# Altium PCB PC110-itx.PcbDoc (part 11 of 16)
Units mm, origin at the board's own origin, x right, y up, seen from the top; angles counter-clockwise.
Board outline 170 x 170 mm, 16 copper layers (FC1, FC2, FC3, FC4, IP1, IC1, IC2, IP2, IP3, IC3, IC4, IP4, BC4, BC3, BC2, BC1), stack 3.903 mm thick; 935 components, 1357 nets, 4698 pads, 3240 vias.
Unrouted connection lines stored in the file: 552.
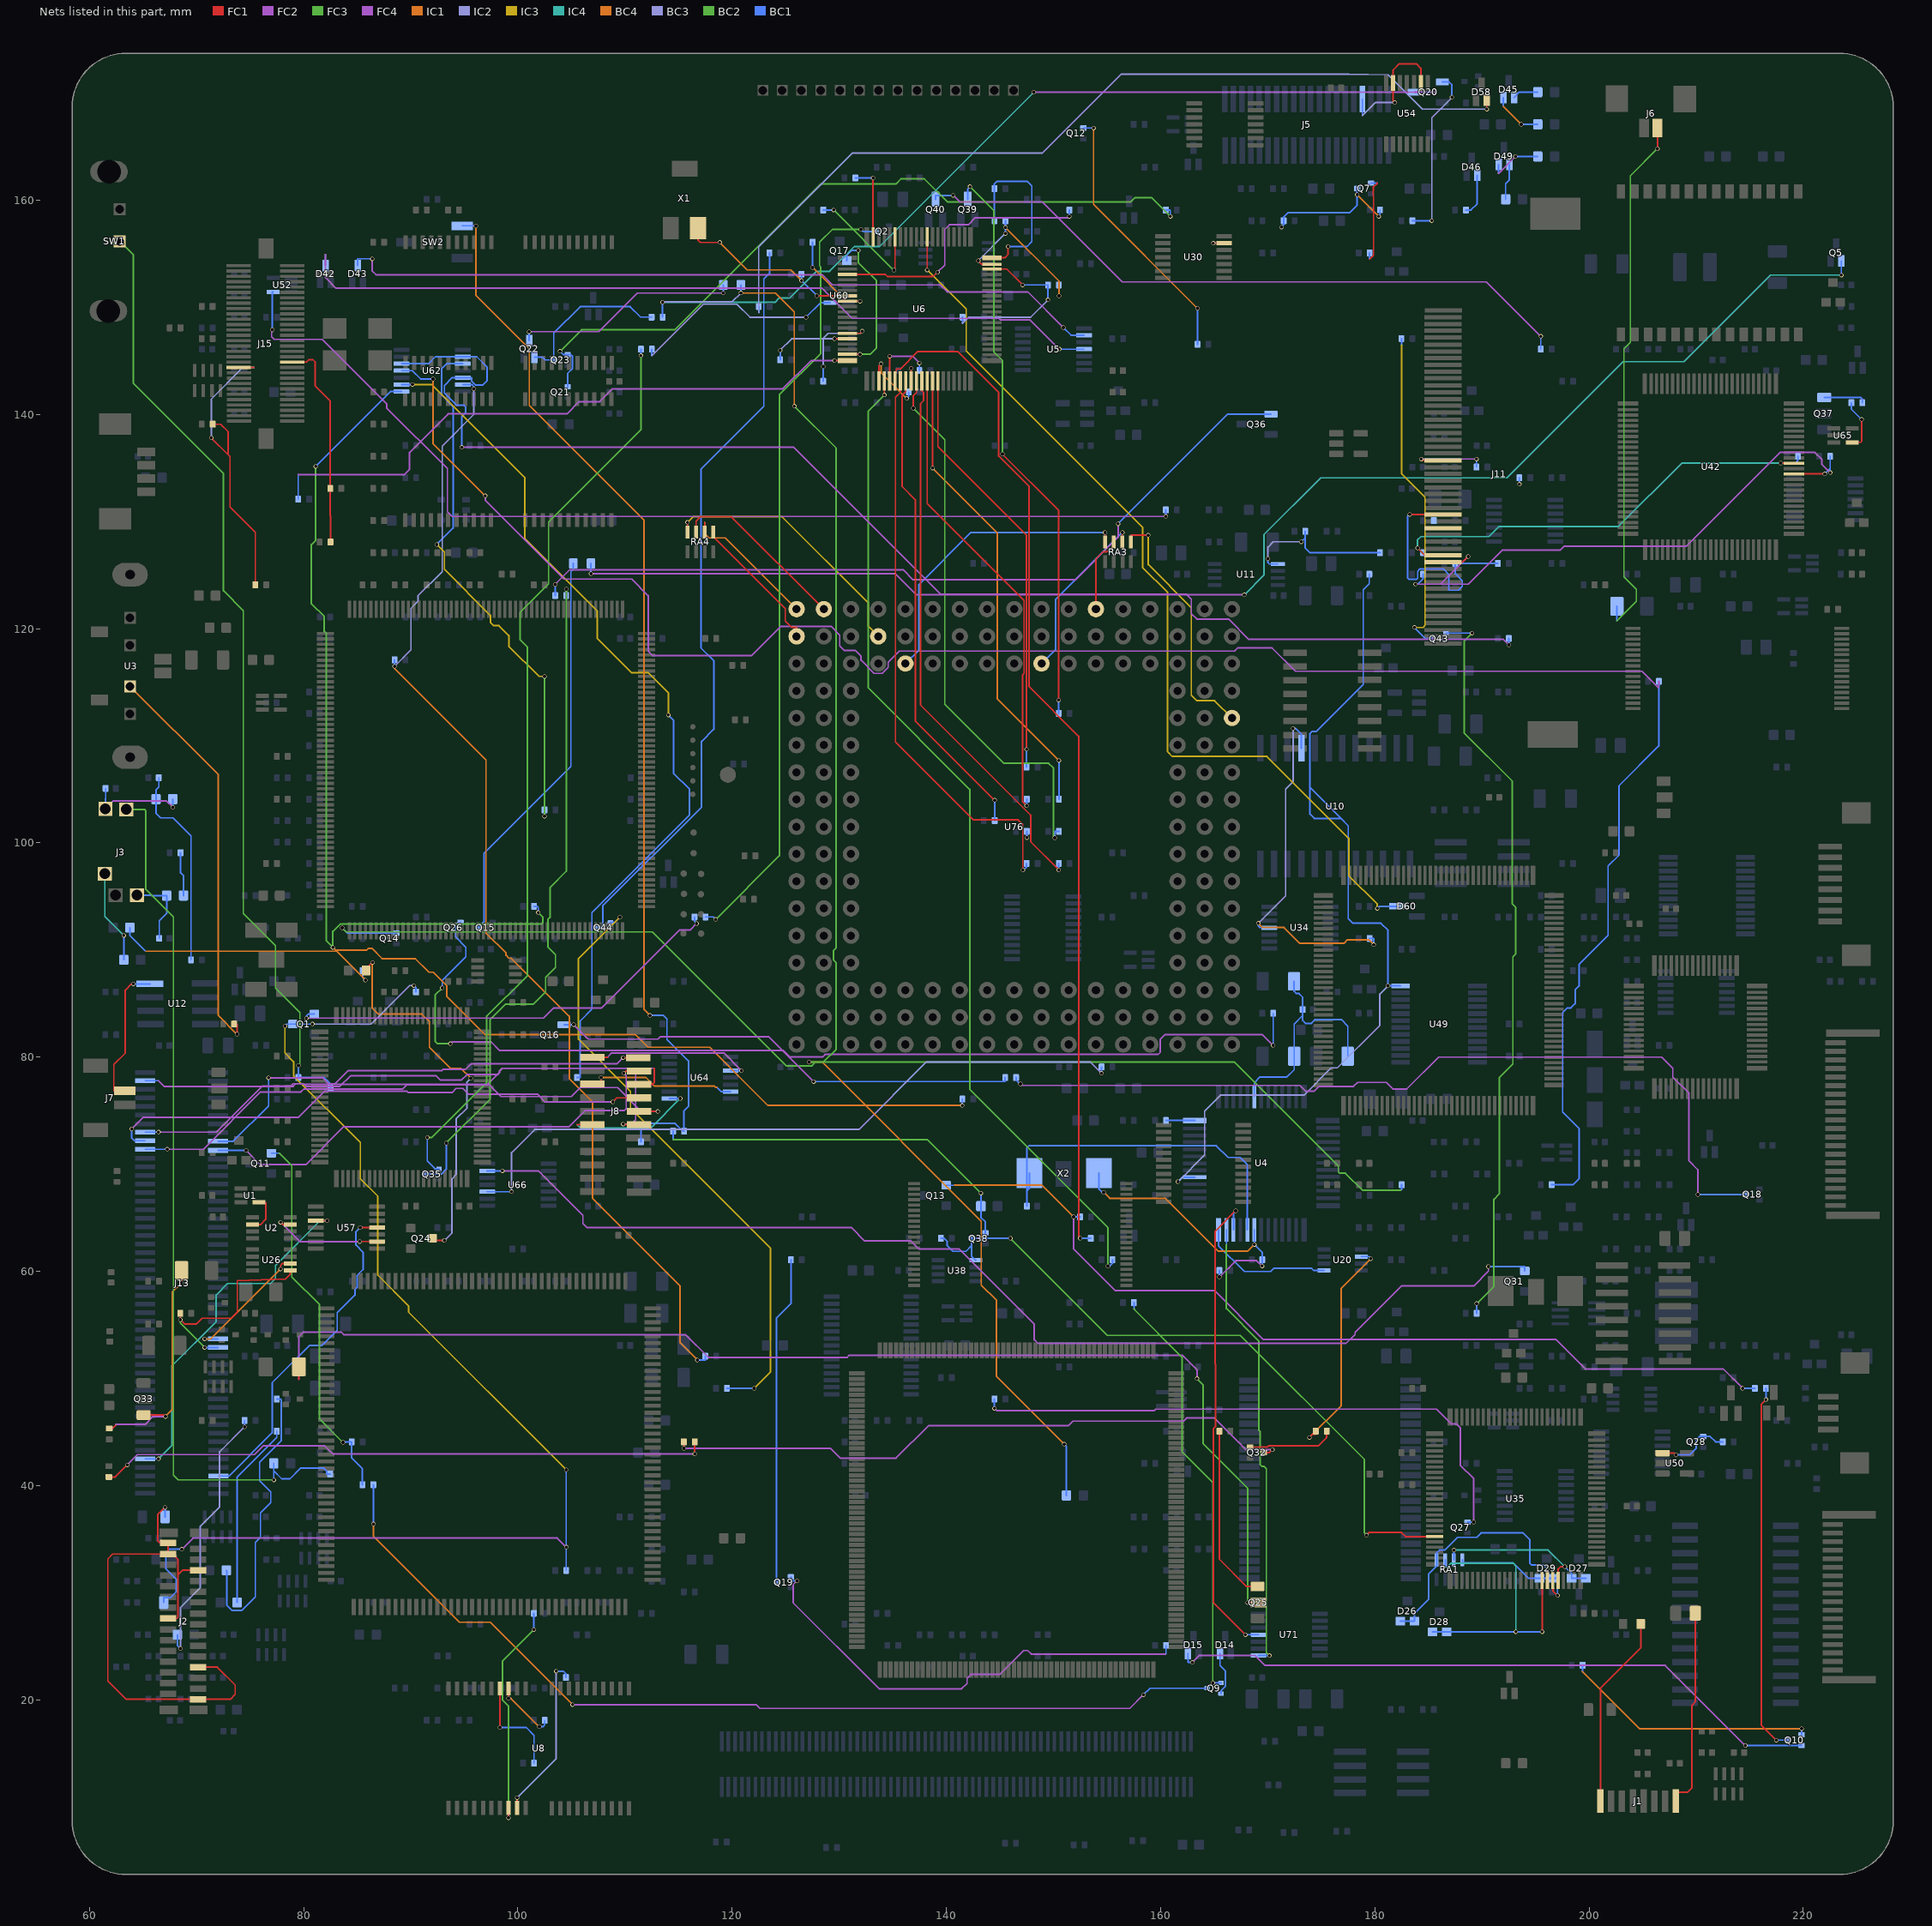
[diagram p24: the nets of this part, all layers, seen from the top]

## Via types
v1: diameter 0.4, hole 0.3, FC1 to BC1, 3240 vias

## Nets (pads, with @x,y where several pads share a name; then routed paths per layer and width w, separated by ;. In a path a pad name is that pad's centre, name@x,y a point inside that pad or via, vN(x,y) a via of type N, cw(c..) or ccw(c..) an arc to the next point about the centre after c; other vN are vias at no path point) (continued)
Net-(D42-Pad3): D42.3 U5.4 | length 76.8
  FC2 w0.15: 82.05,154.932 82.042,154.94 82.042,152.756 83.007,151.79 128.388,151.79 131.207,148.971 144.905,148.971 145.059,148.818 147.818,148.818 v1(150.546,146.09)
  BC1 w0.15: D42.3@82.05,153.89 82.05,154.932 ; v1(150.546,146.09) U5.4@152.862,146.09
Net-(D43-Pad3): D43.3 U5.2 | length 72.1
  FC2 w0.15: v1(86.411,154.534) 86.411,153.391 86.766,153.035 128.443,153.035 129.383,152.095 139.421,152.095 140.081,151.435 147.599,151.435 v1(150.927,148.107)
  BC1 w0.15: D43.3@85.05,153.89 85.05,154.534 v1(86.411,154.534) ; v1(150.927,148.107) 151.644,147.39 U5.2@152.862,147.39
Net-(D44-A): D44.2 D45.1 | length 4.7
  BC4 w0.15: 192,168.759 191.999,168.758 v1(193.666,167.09)
  BC1 w0.15: 192,168.759 D45.1@192,169.585 ; v1(193.666,167.09) D44.2@195.213,167.09
Net-(D46-Pad2): D46.2 R286.1 | length 4
  BC1 w0.15: R286.1@188.51,159.09 188.976,159.09 189.55,159.664 D46.2@189.55,162.34
Net-(D48-A): D45.2 D48.2 | length 2.4
  BC1 w0.15: D45.2@193,169.585 193.505,170.09 D48.2@195.213,170.09
Net-(D50-A): D49.1 D50.2 | length 5.1
  FC4 w0.15: 191.55,162.518 v1(193.122,164.09)
  BC1 w0.15: 191.55,162.518 D49.1@191.55,163.34 ; v1(193.122,164.09) D50.2@195.213,164.09
Net-(D51-A): D49.2 D51.2 | length 3.4
  BC1 w0.15: D51.2@192.213,160.09 192.213,161.544 192.55,161.881 D49.2@192.55,163.34
Net-(D58-K): D58.1 R308.2 | length 83.6
  FC1 w0.15: v1(190.449,168.504) D58.1@190.45,169.34
  IC2 w0.15: 122.49,149.501 122.479,149.49 122.479,155.651 131.216,164.389 148.946,164.389 156.336,171.78 177.571,171.78 181.229,171.704 184.429,168.504 v1(190.449,168.504)
  BC1 w0.15: 122.49,149.501 R308.2@122.49,150.09
Net-(J1-GND-Pad1): J1.1 R231.2 | length 18.1
  FC1 w0.15: J1.1@201.06,10.55 201.06,21.101 204.825,24.866 R231.2@204.825,27.09
Net-(J1-GND-Pad8): J1.8 R230.2 | length 18.9
  FC1 w0.15: J1.8@208.11,10.55 208.11,11.379 209.194,11.379 209.601,11.786 209.601,19.5 209.913,19.812 R230.2@209.913,28.09
Net-(J2-Pin_1): J2.1 J2.7 J2.16 J2.25 J2.28 J2.30 L10.1 | length 50.9
  FC1 w0.15: v1(67.056,37.973) 66.37,37.287 66.37,34.84 66.548,34.663 J2.30@67.347,34.663 J2.28@67.347,33.612 ; J2.16@67.347,27.612 68.174,27.612 68.275,27.714 68.275,31.706 ; J2.7@70.147,23.062 71.934,23.062 73.609,21.387 73.609,20.52 73.152,20.062 J2.1@70.147,20.062 63.427,20.062 61.722,21.768 61.722,33.155 62.179,33.612 J2.28@67.347,33.612 ; J2.25@70.147,32.113 68.682,32.113 68.275,31.706 ; J2.28@67.347,33.612 67.759,33.612 68.275,33.096 68.275,31.706
  BC1 w0.15: v1(67.056,37.973) 67.063,37.966 L10.1@67.063,37.09
Net-(J3-G): J3.3 L2.2 | length 8.8
  IC4 w0.15: J3.3@61.442,97.125 61.442,93.134 v1(63.213,91.364)
  BC1 w0.15: L2.2@63.213,89.09 v1(63.213,91.364)
Net-(J3-MO): C148.2 J3.5 L8.2 | length 7.1
  BC1 w0.15: J3.5@64.442,95.125 65.786,95.125 65.821,95.09 L8.2@67.213,95.09 67.213,93.428 66.52,92.735 C148.2@66.52,91.09
Net-(J3-SI): C165.1 J3.2 L7.2 | length 82.4
  FC3 w0.15: J3.2@63.442,103.125 65.151,103.125 65.253,103.023 65.253,95.682 67.843,93.091 67.843,40.97 68.275,40.538 v1(77.212,40.538)
  BC1 w0.15: v1(77.212,40.538) 77.212,41.38 ; L7.2@77.212,42.09 77.212,41.38 ; C165.1@82.48,41.09 82.169,41.09 82.169,41.351 81.89,41.631 79.705,41.631 78.715,40.64 77.953,40.64 77.212,41.38
Net-(J3-SO): C159.2 J3.1 L5.1 | length 9.6
  FC2 w0.15: J3.1@61.492,103.175 62.254,103.937 67.183,103.937 v1(67.793,103.327)
  BC1 w0.15: J3.1@61.492,103.175 61.492,104.115 61.52,104.142 C159.2@61.52,105.09 ; L5.1@67.788,104.09 67.788,103.332 v1(67.793,103.327)
Net-(J5-Pin_17): J5.17 U54.2 U54.6 | length 12.5
  FC1 w0.15: v1(181.858,169.113) 181.7,169.271 U54.6@181.7,170.953 181.7,172.156 182.282,172.738 183.876,172.738 184.3,172.314 U54.2@184.3,170.953
  BC3 w0.15: 178.84,167.921 178.841,167.919 180.035,169.113 v1(181.858,169.113)
  BC1 w0.15: 178.84,167.921 J5.17@178.84,169.45
Net-(J6-Pin_1): F1.2 J6.1 | length 49.9
  FC1 w0.15: v1(206.385,164.805) J6.1@206.385,166.735
  FC3 w0.15: 202.6,120.736 204.419,122.555 204.419,123.673 203.251,124.841 203.251,146.126 203.86,146.736 203.86,162.281 v1(206.385,164.805)
  BC1 w0.15: 202.6,120.736 F1.2@202.6,122.09
Net-(J7-Pin_1): J7.1 U12.8 | length 13.4
  FC1 w0.15: J7.1@63.287,76.85 62.281,76.85 62.281,79.319 63.348,80.385 63.348,86.258 63.932,86.843 v1(64.11,86.843)
  BC1 w0.15: v1(64.11,86.843) 64.112,86.84 U12.8@65.65,86.84
Net-(J8-DRT1#): J8.6 U64.8 | length 13.3
  FC1 w0.15: 105.533,73.7 J8.6@106.95,73.7
  IC4 w0.15: 105.533,73.7 105.827,73.406 112.42,73.406 v1(115.164,76.149)
  BC1 w0.15: U64.8@114.137,76.14 115.154,76.14 v1(115.164,76.149)
Net-(J8-RTS1#): J8.9 U64.6 | length 14.1
  FC1 w0.15: J8.9@106.95,77.5 107.772,77.5 v1(107.772,78.105)
  BC4 w0.15: v1(107.772,78.105) 111.938,78.105 112.725,77.318 118.313,77.318 118.44,77.191 118.573,77.191
  BC1 w0.15: 118.573,77.191 118.974,76.79 U64.6@119.862,76.79
Net-(J8-TXD1): J8.11 U64.3 | length 15.8
  FC1 w0.15: J8.11@106.95,80 108.372,80
  FC4 w0.15: 108.372,80 108.767,80.395 119.224,80.395 v1(120.879,78.74)
  BC1 w0.15: U64.3@119.862,78.74 v1(120.879,78.74)
Net-(J11-CE1#): J11.13 R361.1 R366.1 U42.37 | length 57.6
  FC1 w0.15: J11.13@186.358,126.223 188.199,126.223 v1(188.722,126.746) ; U42.37@219.127,134.45 v1(222,134.45)
  FC4 w0.15: v1(183.794,124.155) 186.131,124.155 ; v1(188.722,126.746) 186.131,124.155 ; v1(222.51,134.569) 221.742,135.337 221.742,135.788 221.082,136.449 217.83,136.449 209.067,127.686 197.663,127.686 197.307,127.33 191.897,127.33 188.722,124.155 186.131,124.155
  BC1 w0.15: v1(183.794,124.155) 183.998,124.155 184.51,124.668 R361.1@184.51,125.09 ; v1(222,134.45) 222.51,134.961 ; v1(222.51,134.569) 222.51,134.961 ; R366.1@222.51,136.09 222.51,134.961
Net-(J11-CE2#): J11.14 R360.1 R367.1 U42.39 | length 44.3
  FC1 w0.15: v1(183.998,127.533) 184.607,126.924 J11.14@186.358,126.872 ; v1@217.889,135.45 U42.39@219.127,135.45
  IC4 w0.15: v1(183.998,127.533) 183.972,127.559 183.972,128.27 184.302,128.6 190.652,128.6 191.592,129.54 202.743,129.54 208.661,135.458 v1(217.881,135.458)
  BC1 w0.15: v1(183.998,127.533) 184.441,127.09 R360.1@184.51,127.09 ; v1@217.889,135.45 v1(217.881,135.458) 219.253,135.458 219.51,135.715 R367.1@219.51,136.09
Net-(J11-CSEL#): J11.28 R145.2 | length 8
  FC1 w0.15: v1(184.328,135.839) 184.444,135.723 J11.28@186.358,135.723
  FC2 w0.15: v1(184.328,135.839) v1(189.49,135.839)
  BC1 w0.15: R145.2@189.49,135.09 v1(189.49,135.839)
Net-(J11-IOR#): J11.18 R295.1 R301.2 | length 0.6
  BC1 w0.15: v1(193.49,133.49) R301.2@193.49,134.09
Net-(J11-IOW#): J11.20 R290.2 R299.1 | length 23.2
  FC1 w0.15: v1(183.261,130.672) J11.20@186.358,130.672
  BC1 w0.15: v1(183.261,130.672) 183.058,130.469 183.058,124.739 183.185,124.612 183.896,124.612 183.998,124.714 183.998,125.374 184.201,125.578 186.385,125.578 186.919,125.044 186.919,123.622 186.945,123.596 187.806,123.596 188.162,123.952 188.162,124.486 187.51,125.139 R299.1@187.51,126.09 R290.2@191.49,126.09
Net-(J13-FDD_DRATE0): J13.96 U57.3 | length 33.8
  FC1 w0.15: U57.3@81.138,64.74 v1(82.194,64.74)
  IC4 w0.15: v1(66.446,42.502) 67.716,43.772 67.716,51.206 71.831,55.321 71.831,57.81 72.898,58.877 76.911,58.877 77.368,59.334 77.368,60.554 81.555,64.74 v1(82.194,64.74)
  BC1 w0.15: J13.96@65.207,42.502 v1(66.446,42.502)
Net-(J13-FDD_DRATE1): J13.3 U57.11 | length 32.1
  FC1 w0.15: v1(85.268,64.09) U57.11@86.863,64.09
  BC1 w0.15: J13.3@72.058,40.902 73.034,40.902 77.064,44.932 77.064,49.606 80.543,53.086 81.712,53.086 83.134,54.508 83.134,56.134 84.785,57.785 84.785,58.293 84.988,58.496 84.988,59.614 85.547,60.173 85.547,61.798 84.88,62.465 84.88,63.703 v1(85.268,64.09)
Net-(J13-Modem_ADCK#): J8.21 J13.59 | length 51.9
  FC1 w0.15: v1(108.864,75.819) 109.245,76.2 J8.21@111.3,76.2
  FC4 w0.15: v1(63.957,73.304) 65.049,74.397 79.527,74.397 81.966,76.835 89.631,76.835 89.765,76.701 93.854,76.701 94.242,77.088 94.862,77.088 95.402,76.549 101.81,76.549 102.54,75.819 v1(108.864,75.819)
  BC1 w0.15: v1(63.957,73.304) 63.957,72.456 64.211,72.202 J13.59@65.207,72.202
Net-(J13-Modem_IRQ1#): J8.20 J13.60 | length 53.9
  FC1 w0.15: J8.20@111.3,74.95 113.052,74.95 v1(113.072,74.93)
  FC2 w0.15: v1(67.259,71.402) 70.64,71.402 75.989,76.751 79.75,76.751 80.034,77.036 89.254,77.036 89.637,77.419 97.333,77.419 98.425,76.327 105.004,76.327 105.841,77.165 109.296,77.165 111.53,74.93 v1(113.072,74.93)
  BC1 w0.15: J13.60@65.207,71.402 v1(67.259,71.402)
Net-(J13-Modem_RSRVD1): J8.24 J13.42 | length 44.5
  FC1 w0.15: v1(109.83,79.959) 109.839,79.95 J8.24@111.25,79.95
  FC2 w0.15: v1(76.729,78.08) 81.767,78.08 82.351,77.496 82.906,77.496 84.148,78.739 92.887,78.739 93.015,78.866 95.122,78.866 95.656,79.4 109.271,79.4 v1(109.83,79.959)
  BC1 w0.15: J13.42@72.008,72.153 73.423,72.153 76.729,75.459 v1(76.729,78.08)
Net-(J13-Modem_RSRVD2): J8.23 J13.41 | length 45.7
  FC1 w0.15: v1(109.88,78.511) 110.069,78.7 J8.23@111.3,78.7
  FC4 w0.15: v1(74.625,71.303) 75.951,69.977 80.213,69.977 83.744,73.508 104.775,73.508 106.3,75.032 109.957,75.032 110.109,75.184 110.109,78.283 v1(109.88,78.511)
  BC1 w0.15: J13.41@72.008,71.303 v1(74.625,71.303)
Net-(J13-Modem_S11): J8.22 J13.58 | length 53.5
  FC1 w0.15: J8.22@111.3,77.45 112.573,77.45 112.725,77.602 112.725,78.943 112.7,78.968
  FC2 w0.15: v1(66.446,73.002) 71.859,73.002 76.149,77.292 78.791,77.292 79.02,77.521 79.983,77.521 80.239,77.266 83.378,77.266 84.373,78.261 92.375,78.261 92.76,77.876 94.743,77.876 95.251,78.384 98.127,78.384 98.274,78.531 98.274,78.691 98.552,78.968 112.7,78.968
  BC1 w0.15: J13.58@65.207,73.002 v1(66.446,73.002)
Net-(J13-Modem_VPDA#): J8.19 J13.52 | length 54.1
  FC1 w0.15: v1(109.83,73.762) 109.891,73.7 J8.19@111.3,73.7
  FC4 w0.15: 66.444,77.802 66.98,77.267 79.019,77.267 79.273,77.521 79.983,77.521 80.05,77.455 97.135,77.455 98.295,78.615 98.295,78.711 98.552,78.968 110.465,78.968 110.998,78.435 110.998,74.168 110.592,73.762 v1(109.83,73.762)
  BC1 w0.15: J13.52@65.207,77.802 66.444,77.802
Net-(J13-RXD2): J13.18 R135.1 U26.5 | length 19.8
  FC1 w0.15: R135.1@68.49,56.09 v1(68.49,55.49) 68.887,55.093 70.002,55.093 70.536,55.626 73.254,55.626 73.812,56.184 73.812,59.131 78.308,59.284 78.765,59.741 78.765,60.09 U26.5@78.75,60.09
  BC2 w0.15: v1(68.49,55.49) 68.49,55.177 v1(70.764,52.903)
  BC1 w0.15: v1(70.764,52.903) J13.18@72.008,52.903
Net-(J13-TXD2): J13.19 U26.6 | length 12.3
  FC1 w0.15: v1(77.851,60.223) 77.851,60.562 78.029,60.74 U26.6@78.75,60.74
  IC1 w0.15: v1(70.764,53.703) 71.33,53.703 v1(77.851,60.223)
  BC1 w0.15: v1(70.764,53.703) J13.19@72.008,53.703
Net-(J15-RAS2): J15.11 R102.2 R103.1 | length 29.6
  FC1 w0.15: v1(71.374,137.82) 72.949,136.246 ; R102.2@71.51,139.09 72.263,139.09 72.949,138.404 72.949,136.246 ; J15.11@73.928,144.392 75.355,144.392 ; R103.1@75.49,124.09 75.49,128.98 73.127,131.343 73.127,136.068 72.949,136.246
  IC2 w0.15: v1(71.374,137.82) 71.374,141.427 74.346,144.399 75.362,144.399 75.355,144.392
Net-(J15-RAS3): J15.49 R94.2 R106.1 | length 19.7
  FC1 w0.15: J15.49@78.928,144.893 80.264,144.893 80.482,145.11 80.874,145.11 81.077,144.907 81.077,142.659 82.49,141.245 R106.1@82.49,133.09 82.49,130.576 82.51,130.556 R94.2@82.51,128.09
Net-(L5--): C16.1 L5.2 R24.2 | length 19.2
  BC1 w0.15: C16.1@66.48,106.09 66.48,105.22 66.213,104.953 L5.2@66.213,104.09 66.213,102.774 66.65,102.337 67.818,102.337 69.49,100.665 R24.2@69.49,89.09
Net-(L8-+): L8.1 R30.1 | length 4.1
  BC1 w0.15: R30.1@68.51,99.09 68.51,97.204 68.788,96.926 L8.1@68.788,95.09
Net-(L9--): L9.2 Q1.3 R3.2 R236.1 | length 120.2
  FC2 w0.15: v1(68.631,34.061) 69.672,35.103 103.683,35.103 v1(104.521,34.265)
  IC2 w0.15: v1(80.823,83.09) 86.295,83.09 89.895,86.69 v1(90.297,86.69)
  IC3 w0.15: v1(78.257,82.906) 78.257,80.391 79.071,79.578 79.071,78.257 85.293,72.034 85.293,68.656 86.919,67.031 86.919,59.665 89.79,56.794 89.79,56.21 v1(104.51,41.489)
  BC1 w0.15: L9.2@66.937,29.09 66.937,29.54 67.564,29.54 68.097,30.074 68.097,31.293 67.158,32.233 67.158,33.757 67.462,34.061 v1(68.631,34.061) ; v1(78.257,82.906) 78.442,83.09 Q1.3@79,83.09 v1(80.823,83.09) ; v1(90.297,86.69) 90.49,86.497 R3.2@90.49,86.09 ; R236.1@104.51,32.09 v1@104.51,34.254 ; v1(104.51,41.489) 104.51,34.265 v1@104.51,34.254 ; v1(104.521,34.265) v1@104.51,34.254
Net-(L11-+): L11.1 R14.2 | length 27.4
  BC1 w0.15: L11.1@72.788,32.09 72.788,32.055 72.822,32.055 72.822,28.854 73.33,28.346 74.219,28.346 75.489,29.616 75.489,34.696 75.971,35.179 75.971,37.465 76.937,38.43 76.937,39.421 75.895,40.462 75.895,42.189 77.927,44.221 77.927,47.988 77.826,48.09 R14.2@77.49,48.09
Net-(L13-+): L13.1 R221.2 | length 86.4
  BC4 w0.15: 65.243,89.891 82.982,89.891 83.083,89.992 85.898,89.992 86.068,90.163 86.359,90.163 87.33,89.192 90.437,89.192 91.701,87.928 92.083,87.928 93.369,86.642 93.369,85.655 96.931,82.093 110.998,82.093 112.166,80.924 117.907,80.924 123.342,75.489 v1(141.49,75.489)
  BC1 w0.15: L13.1@63.787,92.09 63.787,91.346 65.243,89.891 ; v1(141.49,75.489) R221.2@141.49,76.09
Net-(L15--): L15.2 Q20.3 R239.1 R240.1 | length 222.6
  FC3 w0.15: v1(125.806,140.767) 129.71,136.863 129.71,90.198 129.477,89.966 129.477,89.062 129.71,88.83 129.71,80.738 128.524,79.553 v1(127.178,79.553)
  IC1 w0.15: v1(120.825,151.335) 124.026,151.335 125.806,149.555 v1(125.806,140.767) ; v1(127.178,79.553) 128.397,79.553 143.256,64.694 143.256,58.725 144.678,57.302 144.678,50.197 v1(151.009,43.866)
  IC2 w0.15: v1(113.51,150.47) 113.564,150.524 120.014,150.524 v1(120.825,151.335)
  IC4 w0.15: v1(113.51,150.47) 124.003,150.47 124.409,150.876 125.4,150.876 127.889,153.365 129.099,153.365 131.41,155.676 133.756,155.676 v1(148.158,170.078)
  FC4 w0.15: v1(148.158,170.078) 185.699,170.078 185.688,170.09
  BC1 w0.15: R240.1@113.51,149.09 v1(113.51,150.47) ; v1(120.825,151.335) R239.1@120.825,152.09 ; v1(151.009,43.866) 151.212,43.663 L15.2@151.212,39.09 ; Q20.3@183.69,170.09 185.688,170.09
Net-(L17-+): L17.1 R20.2 | length 17.5
  BC1 w0.15: L17.1@73.788,29.09 73.788,40.798 77.49,44.501 R20.2@77.49,45.09
Net-(L18--): L18.2 R17.2 | length 25.2
  BC3 w0.15: v1(68.504,24.79) 68.504,28.626 70.333,30.455 70.333,36.195 72.161,38.024 72.161,43.163 v1(74.49,45.491)
  BC1 w0.15: L18.2@68.213,26.09 68.213,25.082 v1(68.504,24.79) ; v1(74.49,45.491) R17.2@74.49,46.09
Net-(Q1-B): Q1.1 R9.2 | length 41.8
  FC2 w0.15: v1(80.264,83.648) 102.387,83.648 103.342,84.604 107.819,84.604 115.087,91.872 116.078,91.872 v1(116.688,92.481)
  BC1 w0.15: v1(80.264,83.648) 80.264,83.837 80.467,84.04 Q1.1@81,84.04 ; R9.2@116.49,93.09 116.49,92.679 v1(116.688,92.481)
Net-(Q2-C): Q2.3 R9.1 | length 74.1
  FC3 w0.15: v1(118.466,92.862) 124.409,98.806 124.409,141.834 128.27,145.694 128.27,153.773 128.169,153.874 128.169,156.084 129.362,157.277 v1(132.029,157.277)
  BC1 w0.15: R9.1@117.51,93.09 118.238,93.09 v1(118.466,92.862) ; v1(132.029,157.277) 132.216,157.09 Q2.3@133.35,157.09
Net-(Q5-B): Q5.2 R111.1 | length 134.4
  IC4 w0.15: v1(167.818,123.165) 169.647,124.993 169.647,128.778 174.955,134.087 192.329,134.087 203.175,144.932 208.864,144.932 216.941,153.01 v1(223.55,153.01)
  FC4 w0.15: v1(106.825,125.128) 135.255,125.128 137.218,123.165 v1(167.818,123.165)
  BC1 w0.15: v1(106.825,125.128) R111.1@106.825,126.09 ; v1(223.55,153.01) Q5.2@223.55,154.34
Net-(Q7-B): Q7.1 R87.1 | length 8.6
  FC1 w0.15: 179.51,154.491 179.883,154.864 179.883,159.537 179.857,161.214 180.234,161.59
  BC1 w0.15: 179.51,154.491 R87.1@179.51,155.09 ; Q7.1@179.65,161.59 180.234,161.59
Net-(Q7-C): C98.1 Q7.3 R146.2 U30.13 | length 14.4
  FC1 w0.15: v1(164.913,155.986) U30.13@165.93,155.986
  BC4 w0.15: v1(178.35,160.511) v1(180.365,158.496)
  BC1 w0.15: v1(171.287,157.49) 171.49,157.693 R146.2@171.49,158.09 171.49,158.434 171.907,158.852 177.664,158.852 178.35,159.537 v1(178.35,160.511) Q7.3@178.35,161.09 ; v1(180.365,158.496) 180.48,158.611 C98.1@180.48,159.09
Net-(Q9-B): Q9.1 R107.1 | length 39.3
  FC3 w0.15: 157.51,56.494 157.505,56.49 162.001,51.994 162.001,43.18 164.873,40.308 v1(164.873,21.59)
  BC1 w0.15: 157.51,56.494 R107.1@157.51,57.09 ; v1(164.873,21.59) Q9.1@165.645,21.59
Net-(Q9-C): Q9.3 R99.1 | length 90.1
  IC1 w0.15: v1(86.51,36.424) 86.51,35.291 94.548,27.254 97.409,27.254 v1(105.105,19.558)
  FC4 w0.15: v1(105.105,19.558) 122.25,19.558 122.606,19.202 157.124,19.202 v1(158.402,20.48)
  BC1 w0.15: v1(86.51,36.424) R99.1@86.51,40.09 ; v1(158.402,20.48) 159.012,21.09 Q9.3@164.355,21.09
Net-(Q9-E): D14.1 Q9.2 | length 4.1
  BC1 w0.15: D14.1@165.55,24.34 165.55,23.216 166.065,22.7 166.065,21.285 165.645,20.865 Q9.2@165.645,20.59
Net-(Q10-B): Q10.1 R97.1 | length 23.8
  BC4 w0.15: 199.392,22.633 199.39,22.631 204.702,17.32 v1(219.84,17.32)
  BC1 w0.15: 199.392,22.633 R97.1@199.392,23.241 ; Q10.1@219.84,16.74 v1(219.84,17.32)
Net-(Q10-C): Q10.3 R100.1 | length 34.7
  FC1 w0.15: v1(216.51,48.031) 216.078,47.599 216.078,17.637 v1(217.475,16.24)
  BC1 w0.15: v1(216.51,48.031) R100.1@216.51,49.09 ; v1(217.475,16.24) Q10.3@218.54,16.24
Net-(Q10-E): D15.1 Q10.2 | length 61.9
  FC2 w0.15: v1(162.966,23.495) 163.627,24.155 168.808,24.155 169.748,23.216 207.112,23.216 v1(214.587,15.74)
  BC1 w0.15: D15.1@162.55,24.34 162.575,23.495 v1(162.966,23.495) ; v1(214.587,15.74) Q10.2@219.84,15.74
Net-(Q11-B): Q11.1 R93.2 R99.2 | length 35.4
  FC3 w0.15: 77.724,71.04 77.728,71.044 78.892,69.879 78.892,59.487 81.483,56.896 81.483,46.228 v1(83.668,44.044)
  BC1 w0.15: Q11.1@77,71.04 77.724,71.04 ; v1(83.668,44.044) 83.714,44.09 R93.2@84.49,44.09 84.49,42.58 85.49,41.58 R99.2@85.49,40.09
Net-(Q12-B): Q12.1 R85.2 | length 25.2
  IC1 w0.15: v1(153.746,166.743) 153.746,159.614 v1(163.447,149.913)
  BC1 w0.15: Q12.1@152.796,166.743 v1(153.746,166.743) ; R85.2@163.447,146.558 v1(163.447,149.913)
Net-(Q13-B): Q13.1 R95.2 R100.2 | length 85.7
  FC4 w0.15: v1(151.89,65.09) 151.89,62.08 155.753,58.217 165.024,58.217 169.596,53.645 196.926,53.645 199.669,50.902 212.522,50.902 v1(214.333,49.09)
  BC4 w0.15: 140.741,68.04 140.748,68.047 148.933,68.047 v1(151.89,65.09)
  BC1 w0.15: Q13.1@140,68.04 140.741,68.04 ; v1(151.89,65.09) R95.2@152.49,65.09 ; v1(214.333,49.09) R100.2@215.49,49.09
Net-(Q14-B): Q14.1 R114.1 | length 115.4
  BC2 w0.15: v1(83.591,92.075) 83.972,91.694 112.547,91.694 125.044,79.198 127.458,79.198 127.813,79.553 166.878,79.553 176.598,69.833 176.598,69.291 176.714,69.175 177.255,69.175 178.866,67.565 182.422,67.565
  BC1 w0.15: v1(83.591,92.075) 84.076,91.59 Q14.1@88.65,91.59 ; 182.422,67.565 182.51,67.653 R114.1@182.51,68.09
Net-(Q15-C): Q15.3 R111.2 | length 37.8
  BC1 w0.15: Q15.3@96.35,92.09 96.35,92.354 96.546,92.354 96.836,92.645 96.836,99.021 104.953,107.137 104.953,125.335 105.175,125.557 R111.2@105.175,126.09
Net-(Q16-B): Q16.1 R185.2 | length 43.9
  FC2 w0.15: v1(105.207,83.04) 106.558,81.689 113.078,81.689 113.304,81.915 123.419,81.915 v1(127.61,77.724)
  BC1 w0.15: Q16.1@104.31,83.04 v1(105.207,83.04) ; v1(127.61,77.724) 145.49,77.724 R185.2@145.49,78.09
Net-(Q17-B): Q17.3 U6.39 | length 14.5
  FC1 w0.15: U6.39@130.76,145.625 131.946,145.625 v1(131.953,145.618)
  BC2 w0.15: v1(131.775,155.321) 131.775,154.178 133.477,152.476 133.477,146.202 132.893,145.618 v1(131.953,145.618)
  BC1 w0.15: Q17.3@130.7,154.365 130.7,154.838 131.183,155.321 v1(131.775,155.321)
Net-(Q18-C): Q18.3 R185.1 | length 81.4
  FC2 w0.15: v1(146.916,77.495) 147.043,77.368 172.999,77.368 173.535,76.833 174.346,76.833 174.78,77.268 178.015,77.268 178.389,77.642 181.083,77.642 181.686,77.038 182.982,77.038 185.953,80.01 206.781,80.01 207.823,78.969 207.823,78.13 209.321,76.632 209.321,70.333 210.16,69.494 v1(210.16,67.183)
  BC1 w0.15: R185.1@146.51,78.09 146.51,77.902 v1(146.916,77.495) ; v1(210.16,67.183) Q18.3@214.615,67.183
Net-(Q19-B): Q19.1 R399.1 | length 44
  FC2 w0.15: v1(126.06,31.115) 125.705,30.759 125.705,29.058 133.731,21.031 141.427,21.031 141.935,21.539 141.935,22.022 142.287,22.374 144.98,22.374 147.218,24.613 147.599,24.613 147.93,24.282 160.452,24.282
  BC1 w0.15: Q19.1@125.491,31.488 125.491,31.115 v1(126.06,31.115) ; 160.452,24.282 160.51,24.341 R399.1@160.51,25.09
Net-(Q19-C): Q19.3 R410.2 | length 30.7
  BC1 w0.15: Q19.3@124.191,30.988 124.155,30.988 124.155,55.651 125.49,56.986 R410.2@125.49,61.09
Net-(Q20-B): Q20.1 R232.1 | length 16.3
  BC3 w0.15: v1(185.318,158.09) 185.318,167.716 v1(187.198,169.596)
  BC1 w0.15: R232.1@183.51,158.09 v1(185.318,158.09) ; Q20.1@186.31,171.04 186.944,171.04 187.198,170.786 v1(187.198,169.596)
Net-(Q21-B): Q21.1 Q23.1 R237.2 | length 70.8
  BC2 w0.15: v1(103.937,145.898) 105.943,147.904 114.63,147.904 128.245,161.519 135.28,161.519 135.763,162.001 137.947,162.001 140.106,159.842 157.226,159.842 157.632,160.249 159.156,160.249 v1(160.909,158.496)
  BC1 w0.15: v1(103.937,145.898) 104.244,145.59 Q23.1@104.65,145.59 104.953,145.59 105.105,145.438 105.105,144.297 104.65,143.842 Q21.1@104.65,142.59 ; R237.2@160.49,159.09 160.909,159.09 v1(160.909,158.496)
Net-(Q22-B): Q22.2 Q23.3 R240.2 | length 15
  BC1 w0.15: Q22.2@101.55,145.34 102.311,145.34 102.561,145.09 Q23.3@103.35,145.09 103.35,147.597 105.816,150.063 110.482,150.063 111.455,149.09 R240.2@112.49,149.09
Net-(Q22-C): Q22.3 R239.2 | length 21.2
  FC2 w0.15: v1(101.05,147.726) 107.544,147.726 111.15,151.333 v1(119.177,151.333)
  BC1 w0.15: Q22.3@101.05,146.89 v1(101.05,147.726) ; R239.2@119.175,152.09 119.175,151.335 v1(119.177,151.333)
Net-(Q24-C): Q24.3 R238.2 | length 36.1
  FC1 w0.15: R238.2@85.825,88.09 85.825,88.238 v1(86.436,88.849) ; Q24.3@92,63.09 92,62.89 v1(93.142,62.89)
  BC4 w0.15: v1(86.436,88.849) 86.41,88.823 86.41,84.583 86.97,84.023 91.034,84.023 91.745,83.312 91.745,80.924 93.701,78.969 94.666,78.969 v1(95.606,78.029)
  BC3 w0.15: v1(93.142,62.89) 93.853,63.602 93.853,68.656 94.234,69.037 94.234,74.244 95.25,75.26 95.25,77.673 v1(95.606,78.029)
Net-(Q25-B): Q25.1 R242.1 | length 16.6
  FC1 w0.15: R242.1@165.49,45.09 165.49,33.146 168.046,30.59 Q25.1@169.05,30.59
Net-(Q25-C): Q25.2 R241.2 | length 115.5
  FC1 w0.15: 79.55,49.939 R241.2@79.55,51.09 ; v1(168.123,29.09) Q25.2@169.137,29.09
  FC3 w0.15: v1(163.398,49.987) 163.982,49.404 163.982,43.917 168.123,39.776 v1(168.123,29.09)
  FC4 w0.15: 79.55,49.939 79.553,49.936 79.553,53.897 79.986,54.331 83.515,54.331 83.77,54.076 115.672,54.076 117.78,51.968 130.736,51.968 130.938,52.171 162.039,52.171 163.398,50.812 v1(163.398,49.987)
Net-(Q26-B): Q26.1 R254.1 | length 97
  FC3 w0.15: v1(92.939,86.462) 92.278,85.801 92.278,81.483 92.507,81.255 v1(93.701,81.255)
  FC4 w0.15: v1(93.701,81.255) 93.878,81.432 97.485,81.432 98.293,80.625 124.785,80.625 125.395,80.015 128.428,80.015 128.677,80.264 159.766,80.264 159.969,80.467 159.969,81.686 160.387,82.105 169.508,82.105 v1(170.51,81.102)
  BC1 w0.15: v1(92.939,86.462) 92.939,87.173 95.148,89.383 95.148,90.272 94.183,91.237 94.183,92.488 Q26.1@94.65,92.59 ; v1(170.51,81.102) R254.1@170.51,84.09
Net-(Q27-B): Q27.1 R262.2 | length 55.1
  FC2 w0.15: v1(144.49,47.219) 144.693,47.015 159.408,47.015 159.535,47.142 185.753,47.142 187.146,45.749 187.652,45.749 187.982,45.419 187.982,41.901 189.23,40.654 v1(189.23,36.601)
  BC1 w0.15: v1(144.49,47.219) R262.2@144.49,48.09 ; Q27.1@188.65,36.59 189.219,36.59 v1(189.23,36.601)
Net-(Q28-B): Q28.1 R260.2 U50.1 | length 7.1
  FC1 w0.15: U50.1@206.862,43.04 207.963,43.04 v1(208.128,42.875)
  BC1 w0.15: v1(208.128,42.875) 209.398,42.875 210.007,43.485 210.007,44.298 210.3,44.59 Q28.1@210.65,44.59 211.303,44.59 211.803,44.09 R260.2@212.49,44.09
Net-(Q31-B): Q31.1 U66.13 | length 108.6
  FC2 w0.15: v1(98.549,69.39) 101.91,69.39 106.068,65.233 106.068,64.493 106.477,64.084 131.153,64.084 132.384,62.853 136.677,62.853 137.427,62.103 141.173,62.103 148.209,55.067 148.209,53.619 148.539,53.289 177.317,53.289 178.156,54.127 178.156,54.325 182.479,58.648 189.235,58.648 190.602,60.015 v1(190.602,60.452)
  BC1 w0.15: U66.13@97.138,69.39 v1(98.549,69.39) ; v1(190.602,60.452) 194,60.452 Q31.1@194,60.04
Net-(Q32-B): Q32.1 R289.2 | length 8.1
  FC1 w0.15: Q32.1@168.35,43.59 169.956,43.59 170.079,43.713 174.722,43.713 175.51,44.501 R289.2@175.51,45.09
Net-(Q32-C): Q32.3 R291.1 | length 59.6
  FC1 w0.15: v1(115.49,43.489) R291.1@115.49,44.09 ; Q32.3@169.65,43.09 170.166,43.09 v1(170.434,43.358)
  FC2 w0.15: v1(115.49,43.489) 129.181,43.489 130.099,42.57 135.306,42.57 138.329,45.594 151.385,45.594 151.818,46.027 162.133,46.027 162.423,46.317 165.036,46.317 167.995,43.358 v1(170.434,43.358)
Net-(Q33-E): F2.1 Q33.3 R293.2 | length 22.1
  FC1 w0.15: R293.2@61.85,45.34 62.179,45.34 62.459,45.619 ; Q33.3@65.05,46.59 66.969,46.59 v1(67.103,46.457) ; v1(68.6,58.928) F2.1@68.6,60.09
  FC2 w0.15: 62.459,45.619 62.459,45.72 65.202,45.72 65.938,46.457 v1(67.103,46.457)
  IC1 w0.15: v1(67.103,46.457) 67.742,47.096 67.742,58.07 v1(68.6,58.928)
Net-(Q35-B): Q35.1 R321.2 | length 86.3
  FC3 w0.15: v1(91.542,72.492) 91.948,72.492 97.079,77.622 97.079,83.82 100.889,87.63 100.889,118.288 100.203,118.974 100.203,121.512 102.87,124.179 102.87,129.972 111.481,138.582 v1(111.481,145.491)
  BC1 w0.15: v1(91.542,72.492) 91.542,70.301 92.253,69.59 Q35.1@92.645,69.59 ; v1(111.481,145.491) 111.49,145.501 R321.2@111.49,146.09
Net-(Q35-C): Q35.3 R320.1 | length 63.6
  FC3 w0.15: v1(93.32,71.984) 97.409,76.073 97.409,83.515 98.836,84.943 101.427,84.943 102.591,86.106 102.591,87.452 103.51,88.372 103.51,89.577 102.795,90.292 102.795,92.836 102.998,93.039 102.998,95.835 104.521,97.358 v1(104.521,123.687)
  BC1 w0.15: Q35.3@91.355,69.09 92.862,69.09 93.32,69.547 v1(93.32,71.984) ; R320.1@104.51,123.09 104.51,123.676 v1(104.521,123.687)
Net-(Q36-B): Q36.1 R320.2 | length 76
  FC4 w0.15: v1(103.49,124.14) 104.851,125.501 135.966,125.501 136.906,124.562 152.044,124.562 156.032,128.549 v1(156.032,129.794)
  BC1 w0.15: R320.2@103.49,123.09 v1(103.49,124.14) ; v1(156.032,129.794) 166.278,140.04 Q36.1@170.31,140.04
Net-(Q37-B): Q37.1 R368.1 | length 4
  BC1 w0.15: Q37.1@221.95,141.59 225.349,141.59 225.51,141.429 R368.1@225.51,141.09
Net-(Q38-B): C277.2 Q38.1 R382.2 | length 35.5
  BC2 w0.15: 114.49,72.301 114.478,72.288 138.252,72.288 v1(143.225,67.316)
  BC1 w0.15: 114.49,72.301 R382.2@114.49,73.09 ; v1(143.225,67.316) C277.2@143.225,66.09 143.225,65.043 143.65,64.618 Q38.1@143.65,63.59
Net-(Q38-C): Q38.3 R216.2 U35.45 U38.1 | length 65
  FC1 w0.15: v1(179.222,35.382) 179.467,35.626 182.491,35.626 182.867,35.25 U35.45@185.57,35.25
  BC2 w0.15: v1(145.977,63.09) 155.042,54.026 167.437,54.026 179.019,42.443 179.019,35.585 v1(179.222,35.382)
  BC1 w0.15: R216.2@139.49,63.09 139.802,63.09 140.081,62.811 140.081,62.408 140.614,61.874 141.834,61.874 142.35,62.391 ; U38.1@142.75,61.04 142.35,61.44 142.35,62.391 ; v1(145.977,63.09) Q38.3@142.35,63.09 142.35,62.391
Net-(Q39-C): Q39.2 R388.2 | length 53.9
  FC1 w0.15: v1(145.237,136.296) 150.49,131.044 v1(150.49,113.34)
  FC3 w0.15: v1(142.215,161.265) 144.45,159.029 144.45,145.821 145.237,145.034 v1(145.237,136.296)
  BC1 w0.15: Q39.2@142,160.09 142,161.05 v1(142.215,161.265) ; R388.2@150.49,112.09 v1(150.49,113.34)
Net-(Q40-C): Q40.2 R386.2 | length 63.5
  FC4 w0.15: v1(140.64,160.452) 141.249,159.842 148.946,159.842 156.413,152.375 190.41,152.375 v1(195.49,147.295)
  BC1 w0.15: Q40.2@139,160.09 139,160.452 v1(140.64,160.452) ; R386.2@195.49,146.09 v1(195.49,147.295)
Net-(Q43-B): Q43.1 R392.1 | length 69.7
  FC3 w0.15: v1(189.078,119.59) 188.332,118.844 188.332,110.271 192.84,105.762 192.84,94.306 193.141,94.005 193.141,89.612 192.888,89.358 192.888,79.35 191.618,78.08 191.618,67.234 191.11,66.726 191.11,58.597 v1(189.51,56.998)
  BC1 w0.15: Q43.1@186.645,119.59 v1(189.078,119.59) ; R392.1@189.51,56.09 v1(189.51,56.998)
Net-(Q43-C): Q43.3 R412.2 | length 30.9
  IC3 w0.15: 182.49,146.465 182.499,146.456 182.499,134.468 184.683,132.283 184.683,120.294 184.506,120.117 v1(183.693,120.117)
  BC1 w0.15: 182.49,146.465 R412.2@182.49,147.09 ; v1(183.693,120.117) 184.719,119.09 Q43.3@185.355,119.09
Net-(Q44-B): Q44.1 R398.1 | length 57.3
  IC3 w0.15: v1(109.525,93.066) 105.664,89.205 105.664,81.674 110.515,76.823 110.515,75.235 123.596,62.154 123.596,50.622 v1(122.064,49.09)
  BC1 w0.15: Q44.1@108.645,92.59 109.049,92.59 v1(109.525,93.066) ; R398.1@119.51,49.09 v1(122.064,49.09)
Net-(Q44-C): Q44.3 R409.2 | length 70.9
  BC1 w0.15: Q44.3@107.355,92.09 107.696,92.09 107.925,92.319 107.925,94.132 117.145,103.353 117.145,109.474 118.288,110.617 118.288,117.018 117.094,118.212 117.094,134.899 122.961,140.767 122.961,152.638 123.49,153.167 R409.2@123.49,155.09
Net-(R67-Pad1): R67.1 R73.2 U11.1 | length 15
  IC2 w0.15: v1(170.02,126.543) 170.02,127.61 170.528,128.118 v1(173.129,128.118)
  BC1 w0.15: v1(170.02,126.543) 170.02,126.187 170.167,126.04 U11.1@170.95,126.04 ; v1(173.129,128.118) 173.51,128.499 ; R67.1@173.51,129.09 173.51,128.499 ; R73.2@180.49,127.09 173.939,127.09 173.51,127.519 173.51,128.499
Net-(R268-Pad2): R268.2 U52.4 | length 97.9
  FC4 w0.15: v1(77.064,147.904) 77.064,147.701 77.013,147.65 77.013,147.269 77.267,147.015 81.737,147.015 87.757,140.995 87.757,140.614 93.421,134.95 93.421,130.937 93.878,130.48 v1(160.49,130.48)
  BC1 w0.15: v1(77.064,147.904) 77.064,151.44 U52.4@77.15,151.44 ; v1(160.49,130.48) R268.2@160.49,131.09
Net-(R289-Pad1): R289.1 U20.2 | length 21
  FC1 w0.15: v1(173.888,44.501) 174.193,44.806 174.49,44.806 R289.1@174.49,45.09
  IC1 w0.15: v1(173.888,44.501) 176.86,47.473 176.86,58.42 v1(179.629,61.189)
  BC1 w0.15: U20.2@178.75,61.39 179.427,61.39 v1(179.629,61.189)
Net-(R291-Pad2): R291.2 R297.1 | length 57.3
  FC1 w0.15: R297.1@61.82,40.81 62.408,40.81 v1(63.533,41.935) ; v1(116.51,42.97) R291.2@116.51,44.09
  FC2 w0.15: v1(63.533,41.935) 64.498,42.901 75.413,42.901 76.225,43.713 81.966,43.713 82.709,42.97 v1(116.51,42.97)
Net-(R321-Pad1): R321.1 U60.4 | length 20.3
  IC2 w0.15: 112.51,145.503 112.522,145.491 117.325,150.294 120.445,150.294 121.666,149.073 v1(126.903,149.073)
  BC1 w0.15: 112.51,145.503 R321.1@112.51,146.09 ; v1(126.903,149.073) 128.27,150.44 U60.4@129.15,150.44
Net-(R332-Pad1): R332.1 R340.1 U62.8 | length 85.6
  FC3 w0.15: v1(81.128,135.153) 81.128,128.244 80.729,127.845 80.729,122.33 81.922,121.137 81.922,119.738 82.125,119.535 82.125,90.849 v1(82.728,90.246)
  IC1 w0.15: v1(82.728,90.246) v1(85.776,87.198)
  BC2 w0.15: v1(82.728,90.246) 82.728,91.745 83.414,92.431 102.21,92.431 102.337,92.558 102.337,93.066 v1(101.905,93.497)
  BC1 w0.15: v1(81.128,135.153) 88.114,142.14 U62.8@89.137,142.14 ; R332.1@85.51,88.09 85.51,87.464 v1(85.776,87.198) ; R340.1@101.51,94.09 101.803,94.09 101.905,93.988 v1(101.905,93.497)
Net-(R341-Pad2): R341.2 R348.2 U62.6 | length 108.6
  IC1 w0.15: v1(88.49,116.49) 88.49,116.268 97.028,107.73 97.028,91.592 98.894,89.727 98.894,89.525 99.162,89.257 99.363,89.257 104.8,83.82 104.8,78 106.959,75.841 106.959,66.827 115.138,58.649 115.138,53.34 v1(116.749,51.729)
  BC3 w0.15: v1(88.49,116.49) 90.018,118.018 90.018,121.895 90.677,122.554 90.677,123.062 92.939,125.324 92.939,137.058 95.885,140.005 v1(95.885,142.392)
  BC1 w0.15: v1(88.49,116.49) R341.2@88.49,117.09 ; U62.6@94.862,142.79 95.691,142.79 95.885,142.596 v1(95.885,142.392) ; v1(116.749,51.729) 117.49,51.729 R348.2@117.49,52.09
Net-(R344-Pad1): R344.1 R353.1 U62.11 | length 196.2
  FC2 w0.15: v1(96.952,132.41) 96.952,132.004 104.318,124.638 110.617,124.638 112.166,123.088 112.166,117.907 112.573,117.5 121.844,117.5 124.562,120.218 129.235,120.218 130.048,119.405 130.048,118.389 130.454,117.983 131.496,117.983 132.029,117.45 132.029,117.064 133.263,115.83 134.022,115.83 134.569,116.377 134.569,116.865 135.611,117.907 166.903,117.907 167.208,118.212 170.409,118.212 172.593,116.027 204.953,116.027 206.502,114.478 206.51,115.09
  IC1 w0.15: v1(92.075,143.307) 92.075,137.287 v1(96.952,132.41)
  BC1 w0.15: U62.11@89.137,144.09 90.149,144.09 90.932,143.307 v1(92.075,143.307) ; R344.1@196.51,68.09 198.494,68.09 199.085,68.682 199.085,73.33 197.536,74.879 197.536,84.176 197.96,84.599 198.304,84.599 198.704,85 198.704,86.284 199.06,86.639 199.06,88.655 201.778,91.373 201.778,97.841 202.794,98.857 202.794,105.334 206.51,109.05 R353.1@206.51,115.09
Net-(R350-Pad2): R350.2 U62.3 | length 50.4
  FC3 w0.15: v1(102.489,102.493) v1(102.489,115.546)
  IC3 w0.15: v1(92.431,127.864) 93.142,127.152 93.142,125.539 97.434,121.246 97.434,120.6 97.744,120.291 98.244,120.291 99.165,119.37 99.165,118.364 101.983,115.546 v1(102.489,115.546)
  BC1 w0.15: v1(92.431,127.864) 93.955,129.388 93.955,140.735 92.888,141.802 92.888,144.272 93.356,144.74 U62.3@94.862,144.74 ; v1(102.489,102.493) v1(102.489,102.493) R350.2@102.49,103.09
Net-(R357-Pad1): R357.1 U62.2 U62.5 U62.12 | length 128.8
  FC2 w0.15: v1(94.767,136.931) 125.755,136.931 139.469,123.218 162.405,123.218 162.865,122.758 162.865,121.412 163.373,120.904 166.345,120.904 168.25,118.999 191.999,118.999 v1(192.507,118.491)
  BC1 w0.15: U62.12@89.137,144.74 91.669,144.74 92.319,145.39 U62.2@94.862,145.39 96.164,145.39 97.13,144.424 97.13,143.151 96.723,142.744 96.063,142.744 95.682,143.125 95.682,143.44 U62.5@94.862,143.44 93.878,143.44 93.142,142.703 93.142,142.008 94.299,140.851 94.996,140.851 95.123,140.725 95.123,140.157 94.767,139.802 v1(94.767,136.931) ; v1(192.507,118.491) 192.507,119.09 R357.1@192.51,119.09
Net-(R358-Pad1): R358.1 U62.9 | length 83
  IC3 w0.15: v1(90.153,142.799) 91.948,142.799 100.635,134.112 100.635,128.422 107.417,121.641 107.417,119.075 110.592,115.9 112.166,115.9 114.046,114.021 v1(114.046,111.938)
  BC1 w0.15: U62.9@89.137,142.79 90.145,142.79 v1(90.153,142.799) ; R358.1@105.51,78.09 105.816,78.09 105.816,83.388 106.909,84.48 106.909,93.498 116.027,102.616 116.027,105.004 114.529,106.502 114.529,111.455 v1(114.046,111.938)
Net-(R368-Pad2): R368.2 U65.4 | length 4.9
  FC1 w0.15: U65.4@224.55,137.4 225.349,137.4 225.45,137.502 v1(225.45,139.532)
  BC1 w0.15: R368.2@224.49,141.09 224.49,140.492 v1(225.45,139.532)
Net-(R370-Pad2): R370.2 U66.10 | length 65.6
  IC2 w0.15: v1(99.415,67.44) 99.415,71.094 101.575,73.254 131.851,73.254 138.151,79.553 153.423,79.553 v1(154.49,78.486)
  BC1 w0.15: U66.10@97.138,67.44 v1(99.415,67.44) ; v1(154.49,78.486) R370.2@154.49,79.09
Net-(RA1-R1.1): D26.1 D26.3 RA1.1 U35.69 | length 23.4
  FC1 w0.15: U35.69@196.12,31.15 v1(196.12,32.233)
  BC1 w0.15: D26.1@182.375,27.365 D26.3@183.7,27.365 183.7,28.067 185.014,29.381 185.014,31.725 185.775,32.487 RA1.1@185.775,33.09 185.775,33.731 186.029,33.985 186.538,33.985 187.731,35.179 189.509,35.179 189.916,35.585 193.853,35.585 194.462,34.976 194.462,32.791 194.666,32.588 195.764,32.588 v1(196.12,32.233)
Net-(RA1-R2.1): D28.1 D28.3 RA1.2 U35.68 | length 29
  FC1 w0.15: v1(195.62,26.365) U35.68@195.62,31.15
  IC4 w0.15: v1(186.563,32.207) 187.122,32.766 192.913,32.766 193.167,32.512 v1(193.167,26.365)
  BC1 w0.15: D28.1@185.375,26.365 D28.3@186.7,26.365 v1(193.167,26.365) v1(195.62,26.365) ; v1(186.563,32.207) 186.575,32.219 RA1.2@186.575,33.09
Net-(RA1-R3.1): D27.1 D27.3 RA1.3 U35.71 | length 16.3
  FC1 w0.15: U35.71@197.12,31.15 197.12,32.224 197.332,32.436 v1(197.738,32.436)
  IC4 w0.15: v1(187.376,33.985) 196.189,33.985 v1(197.738,32.436)
  BC1 w0.15: RA1.3@187.375,33.09 v1(187.376,33.985) ; v1(197.738,32.436) 198.375,31.799 D27.1@198.375,31.365 D27.3@199.7,31.365
Net-(RA1-R4.1): D29.1 D29.3 RA1.4 U35.70 | length 13
  FC1 w0.15: U35.70@196.62,31.15 196.62,30.177 v1(197.053,29.743)
  BC1 w0.15: RA1.4@188.175,33.09 188.175,32.791 192.913,32.791 194.339,31.365 D29.1@195.375,31.365 D29.3@196.7,31.365 197.053,31.365 v1(197.053,29.743)
Net-(RA3-R1.1): RA3.1 U76.A5 | length 23.5
  FC1 w0.15: RA3.1@157.225,128.09 157.225,128.727 v1(158.852,128.727)
  IC3 w0.15: v1(158.852,128.727) 158.852,125.984 162.865,121.971 162.865,113.792 163.373,113.284 165.046,113.284 U76.A5@166.663,111.667
Net-(RA3-R2.1): RA3.2 U76.H3 | length 16.2
  FC1 w0.15: RA3.2@156.425,128.09 v1(156.425,128.981)
  BC1 w0.15: U76.H3@148.883,116.747 150.202,118.067 150.202,122.758 v1(156.425,128.981)
Net-(RA3-R3.1): RA3.3 U76.F1 | length 7.2
  FC1 w0.15: U76.F1@153.963,121.827 153.963,126.505 154.635,127.178 154.965,127.178 155.625,127.66 RA3.3@155.625,128.09
Net-(RA3-R4.1): RA3.4 U76.N3 | length 28.2
  FC1 w0.15: v1(154.813,128.981) 154.825,128.969 RA3.4@154.825,128.09
  BC1 w0.15: U76.N3@136.183,116.747 137.443,118.008 137.443,124.13 142.295,128.981 v1(154.813,128.981)
Net-(RA4-R1.1): RA4.1 U76.S2 | length 13.3
  FC1 w0.15: RA4.1@118.237,129.032 118.237,128.6 124.968,121.869 124.968,120.701 125.527,120.142 126.023,120.142 U76.S2@126.023,119.287
Net-(RA4-R2.1): RA4.2 U76.S1 | length 13.4
  FC1 w0.15: RA4.2@117.437,129.032 117.437,129.908
  IC1 w0.15: 117.437,129.908 117.45,129.921 117.45,128.88 117.856,128.473 119.377,128.473 U76.S1@126.023,121.827
Net-(RA4-R3.1): RA4.3 U76.R1 | length 16.7
  FC1 w0.15: RA4.3@116.637,129.032 116.637,130.048 117.043,130.454 119.936,130.454 U76.R1@128.563,121.827
Net-(RA4-R4.1): RA4.4 U76.P2 | length 24.8
  FC1 w0.15: RA4.4@115.837,129.032 v1(115.837,129.921)
  IC3 w0.15: v1(115.837,129.921) 116.37,130.454 124.663,130.454 132.712,122.406 132.712,120.218 U76.P2@133.643,119.287
Net-(SW1-B): R277.1 R280.1 SW1.2 | length 88.8
  FC3 w0.15: SW1.2@62.828,156.163 64.11,154.88 64.11,142.9 72.517,134.493 72.517,123.546 74.371,121.691 74.371,93.421 77.368,90.424 77.368,86.436 79.654,84.15 79.654,79.367 v1(79.51,79.223)
  BC1 w0.15: v1(79.51,79.223) R280.1@79.51,78.09 81.926,78.09 82.51,77.506 R277.1@82.51,77.09
Net-(SW2-B): R382.1 R383.2 SW2.2 | length 100.6
  IC1 w0.15: v1(96.088,157.607) 96.088,151.105 101.067,146.126 101.067,140.843 111.76,130.15 111.76,84.48 v1(112.344,83.896)
  BC1 w0.15: SW2.2@94.8,157.615 96.08,157.615 v1(96.088,157.607) ; R383.2@111.49,72.09 111.49,73.152 112.15,73.812 114.695,73.812 115.418,73.09 R382.1@115.51,73.09 115.51,75.006 115.925,75.421 115.925,79.655 113.919,81.661 113.919,83.566 113.589,83.896 v1(112.344,83.896)
Net-(U1-Pad4): U1.4 U2.2 | length 3.6
  FC1 w0.15: U2.2@75.25,64.39 75.997,64.39 76.47,64.863 76.47,66.44 U1.4@75.85,66.44
Net-(U2-Pad7): U2.7 U57.9 | length 10.7
  FC1 w0.15: v1(77.851,64.592) 78.053,64.39 U2.7@78.75,64.39 ; v1(85.242,62.789) v1(85.242,62.789) U57.9@86.863,62.79
  FC2 w0.15: v1(77.851,64.592) 79.654,62.789 v1(85.242,62.789)
Net-(U3-IRDA_TXD): R8.2 U3.7 | length 37.8
  FC1 w0.15: R8.2@73.51,83.09 73.787,83.09 v1(73.787,82.144)
  IC1 w0.15: U3.7@63.8,114.605 72.034,106.371 72.034,83.896 v1(73.787,82.144)
Net-(U4-CMR): C152.1 C155.2 C161.1 R226.1 U4.6 | length 22.6
  BC1 w0.15: U4.6@168.75,76.34 168.75,77.622 169.276,78.149 171.798,78.149 172.475,78.825 C161.1@172.475,80.09 172.475,83.092 173.256,83.873 ; R226.1@172.462,87.09 172.462,86.163 172.68,85.945 172.923,85.945 173.256,85.612 C155.2@173.256,84.455 173.256,83.873 ; C152.1@177.475,80.09 177.475,82.906 176.865,83.515 174.447,83.515 174.092,83.16 173.533,83.16 173.256,83.436 173.256,83.873
Net-(U4-IOR): U4.37 U71.11 | length 44.8
  FC1 w0.15: v1(167.005,65.659) 165.1,63.754 165.1,51.343 165.138,51.305 165.138,45.529 164.922,45.314 164.922,29.087 v1(167.919,26.09)
  BC1 w0.15: U4.37@166.8,63.89 166.8,65.454 v1(167.005,65.659) ; v1(167.919,26.09) U71.11@169.137,26.09
Net-(U4-IOW): U4.38 U71.8 | length 42.6
  FC3 w0.15: 166.15,62.518 166.141,62.509 166.141,56.534 169.165,53.511 169.165,45.18 169.297,45.048 169.297,41.961 169.448,41.81 169.645,41.81 169.875,41.58 169.875,24.409 v1(170.155,24.13)
  BC1 w0.15: 166.15,62.518 U4.38@166.15,63.89 ; U71.8@169.137,24.14 170.145,24.14 v1(170.155,24.13)
Net-(U4-REF): R23.1 U4.52 | length 2.7
  BC1 w0.15: R23.1@160.51,74.09 U4.52@163.2,74.09
Net-(U4-RESET): U4.39 U20.5 | length 12.5
  BC1 w0.15: U4.39@165.4,63.89 165.4,62.413 167.818,59.995 170.282,59.995 170.586,60.3 174.085,60.3 174.295,60.09 U20.5@175.25,60.09
Net-(U4-VCC_Bus): C213.1 U4.44 U49.24 | length 85.3
  BC3 w0.15: v1(161.62,68.377) 164.109,70.866 164.109,74.981 165.583,76.454 173.377,76.454 175.931,79.008 176.497,79.008 180.467,82.978 180.467,85.903 v1(181.229,86.665)
  BC1 w0.15: v1(161.62,68.377) 162.033,68.79 U4.44@163.2,68.79 ; C213.1@179.48,125.09 179.48,124.21 178.918,123.647 178.918,114.783 174.549,110.414 174.142,110.414 173.939,110.211 173.939,105.181 ; U49.24@182.4,86.665 v1(181.229,86.665) 181.229,91.846 180.569,92.507 177.952,92.507 177.521,92.939 177.521,101.6 176.835,102.286 ; 173.939,105.181 176.835,102.286 ; 173.939,105.181 173.939,102.692 174.346,102.286 176.835,102.286
Net-(U4-Xin): C52.1 R70.2 U4.34 X2.1 | length 27.8
  FC2 w0.15: v1(165.49,59.487) 167.014,61.011 168.969,61.011 v1(169.476,60.504)
  BC4 w0.15: v1(154.686,67.386) 155.245,66.827 160.426,66.827 165.354,61.9 168.148,61.9 v1(168.758,62.509) v1@168.75,62.517
  BC1 w0.15: X2.1@154.25,69.19 154.25,67.666 154.529,67.386 v1(154.686,67.386) ; v1(165.49,59.487) R70.2@165.49,60.09 ; v1@168.75,62.517 U4.34@168.75,63.89 ; v1(168.758,62.509) 169.48,61.787 C52.1@169.48,61.09 169.478,61.088 169.478,60.506 v1(169.476,60.504)
Net-(U4-Xout): C53.2 U4.35 X2.2 | length 34.7
  BC1 w0.15: C53.2@147.52,66.09 147.52,67.513 ; X2.2@147.75,69.19 147.75,67.743 147.52,67.513 ; U4.35@168.1,63.89 168.1,69.974 167.437,70.637 166.294,70.637 165.202,71.73 147.701,71.73 147.52,71.549 147.52,69.19 147.52,67.513
Net-(U6-P02): R336.1 U6.52 | length 44.2
  FC1 w0.15: U6.52@138.21,143.125 138.21,131.673 147.26,122.624 147.26,115.824 147.117,115.681 147.117,103.861 v1(147.498,103.48)
  BC1 w0.15: v1(147.498,103.48) 147.51,103.492 R336.1@147.51,104.09
Net-(U6-P03): R339.2 U6.51 | length 51.8
  FC1 w0.15: U6.51@137.71,143.125 137.71,142.223 137.871,142.062 137.871,141.3 137.592,141.021 137.592,112.878 147.879,102.591 147.879,100.101 v1(150.495,97.485)
  BC1 w0.15: R339.2@150.49,98.09 150.495,98.09 v1(150.495,97.485)
Net-(U6-P04): R328.1 U6.50 | length 51.7
  FC1 w0.15: v1(136.906,140.589) 136.906,141.733 137.21,142.037 U6.50@137.21,143.125
  FC3 w0.15: v1(136.906,140.589) 139.852,137.643 139.852,112.954 145.364,107.442 149.555,107.442 149.987,107.01 149.987,100.609 v1(150.114,100.482)
  BC1 w0.15: v1(150.114,100.482) 150.114,101.09 R328.1@150.51,101.09
Net-(U6-P05): R354.1 U6.49 | length 1.8
  FC1 w0.15: U6.49@136.71,143.125 v1(136.71,144.305)
  BC1 w0.15: v1(147.51,100.49) R354.1@147.51,101.09
Net-(U6-P06): R355.1 U6.48 | length 44.7
  FC1 w0.15: U6.48@136.21,143.125 136.21,142.127 135.878,141.795 135.878,133.261 137.109,132.029 137.109,111.388 v1(144.51,103.988)
  BC1 w0.15: R355.1@144.51,102.09 v1(144.51,103.988)
Net-(U6-P10): R413.2 U6.46 | length 96
  FC1 w0.15: U6.46@135.21,143.125 135.331,144.247 135.712,144.247 137.338,145.872 141.046,145.872 144.882,142.037 144.882,136.112 147.72,133.274 147.72,114.586 152.349,109.957 152.349,63.24 v1(152.499,63.09)
  BC1 w0.15: v1(152.499,63.09) R413.2@153.49,63.09
Net-(U6-P11): R167.2 U6.45 | length 6.1
  FC1 w0.15: U6.45@134.71,143.125 v1(134.71,145.44)
  FC4 w0.15: v1(134.71,145.44) 136.855,145.44 v1(137.49,144.806)
  BC1 w0.15: R167.2@137.49,144.09 v1(137.49,144.806)
Net-(U6-P12): R407.1 U6.44 | length 93.4
  FC1 w0.15: v1(134.21,141.808) U6.44@134.21,143.125
  FC3 w0.15: v1(134.21,141.808) 132.715,140.313 132.715,114.467 142.189,104.993 142.189,76.987 155.092,64.084 v1(155.092,60.5)
  BC1 w0.15: v1(155.092,60.5) 155.253,60.5 155.51,60.757 R407.1@155.51,61.09
Net-(U6-P13): R390.2 U6.43 | length 6.6
  FC1 w0.15: U6.43@133.71,143.125 133.71,144.535 v1(133.909,144.734)
  IC1 w0.15: v1(133.909,144.734) 133.909,143.875 v1(136.296,141.488)
  BC1 w0.15: v1(136.296,141.488) 136.49,141.681 R390.2@136.49,142.09
Net-(U6-P16): R86.2 U6.40 | length 58.9
  FC1 w0.15: v1(129.565,145.025) U6.40@130.76,145.025
  FC2 w0.15: 79.49,134.379 79.502,134.391 89.408,134.391 89.891,134.874 89.891,136.449 93.497,140.056 104.572,140.056 105.715,141.199 107.646,141.199 108.839,142.392 124.739,142.392 127.372,145.025 v1(129.565,145.025)
  BC1 w0.15: R86.2@79.49,132.09 79.49,134.379
Net-(U6-P22): R89.2 U6.36 | length 7.6
  FC1 w0.15: v1(129.565,147.066) 129.574,147.075 U6.36@130.76,147.075
  IC2 w0.15: v1(124.49,145.999) 125.557,147.066 v1(129.565,147.066)
  BC1 w0.15: R89.2@124.49,145.09 v1(124.49,145.999)
Net-(U6-P23): R283.1 U6.35 | length 9.4
  FC1 w0.15: U6.35@130.76,147.575 131.954,147.575 v1(132.156,147.777)
  BC3 w0.15: v1(128.51,144.475) 128.51,147.117 128.967,147.574 131.953,147.574 v1(132.156,147.777)
  BC1 w0.15: R283.1@128.51,143.09 v1(128.51,144.475)
Net-(U6-P40): R42.2 U6.24 | length 25.7
  FC1 w0.15: U6.24@130.76,153.075 134.305,153.075 134.505,152.875 138.774,152.875 v1(139.177,153.278)
  FC2 w0.15: v1(139.177,153.278) 139.852,153.953 139.852,157.277 140.284,157.709 142.037,157.709 142.672,158.344 151.338,158.344 v1(151.486,158.492)
  BC1 w0.15: v1(151.486,158.492) 151.49,158.496 R42.2@151.49,159.09
Net-(U6-P45): R38.1 U6.19 | length 7.2
  FC1 w0.15: U6.19@133.16,156.575 v1(133.16,162.09)
  BC1 w0.15: R38.1@131.51,162.09 v1(133.16,162.09)
Net-(U6-P51): R39.1 U6.15 | length 12.1
  FC1 w0.15: v1(135.103,153.467) 135.21,153.574 U6.15@135.21,156.575
  BC2 w0.15: v1(129.479,159.09) v1(135.103,153.467)
  BC1 w0.15: R39.1@128.51,159.09 v1(129.479,159.09)
Net-(U6-P57): D60.3 U6.9 | length 87.2
  FC1 w0.15: v1(138.21,153.492) U6.9@138.21,156.575
  IC3 w0.15: v1(138.21,153.492) 141.859,149.843 141.859,145.923 158.318,129.464 158.318,125.73 160.655,123.393 160.655,108.509 161.087,108.077 169.926,108.077 177.571,100.432 177.571,96.952 180.23,94.293 v1(180.23,93.887)
  BC1 w0.15: v1(180.23,93.887) 180.433,94.09 D60.3@182.063,94.09
Net-(U6-SEG00): R331.2 U6.54 | length 39.5
  FC1 w0.15: U6.54@139.21,143.125 139.21,136.99 147.49,128.71 v1(147.49,108.745)
  BC1 w0.15: R331.2@147.49,107.09 v1(147.49,108.745)
Net-(U6-SEG01): R351.1 U6.53 | length 43.9
  FC1 w0.15: v1(138.71,135.001) U6.53@138.71,143.125
  IC1 w0.15: v1(138.71,135.001) 144.755,128.956 144.755,113.451 v1(150.51,107.696)
  BC1 w0.15: R351.1@150.51,104.09 v1(150.51,107.696)
Net-(U6-SEG07): R330.2 U6.47 | length 54
  FC1 w0.15: U6.47@135.71,143.125 135.71,142.062 135.255,141.607 135.255,109.423 142.519,102.159 146.71,102.159 147.142,101.727 v1(147.142,97.485)
  BC1 w0.15: v1(147.142,97.485) 147.236,97.485 147.49,97.739 R330.2@147.49,98.09
Net-(U6-VL1): R43.2 R63.2 U6.80 | length 17.2
  FC1 w0.15: U6.80@144.26,154.625 145.44,154.625 145.771,154.955 v1(145.771,155.677)
  BC1 w0.15: R43.2@144.49,158.09 R63.2@144.49,161.09 144.49,161.544 144.719,161.773 147.549,161.773 147.98,161.341 147.98,156.134 147.523,155.677 v1(145.771,155.677)
Net-(U6-VL2): R43.1 R62.1 U6.79 | length 15.7
  FC1 w0.15: v1(142.977,154.356) 143.308,154.025 U6.79@144.26,154.025
  IC1 w0.15: v1(145.51,157.461) 150.52,152.451 v1(150.52,151.079)
  IC2 w0.15: v1(142.977,154.356) v1(145.51,156.889)
  BC1 w0.15: v1(145.51,156.889) v1(145.51,157.461) R43.1@145.51,158.09 ; R62.1@150.51,152.09 150.51,151.09 v1(150.52,151.079)
Net-(U6-VL3): R52.1 R62.2 U6.78 | length 16.7
  FC1 w0.15: U6.78@144.26,153.575 145.637,153.575 v1(147.122,152.09)
  IC2 w0.15: 141.51,148.495 142.088,149.073 147.864,149.073 v1(149.49,150.698)
  BC1 w0.15: 141.51,148.495 R52.1@141.51,149.09 ; v1(147.122,152.09) R62.2@149.49,152.09 v1(149.49,150.698)
Net-(U6-Xin): C28.1 U6.28 X1.1 | length 17.8
  FC1 w0.15: X1.1@116.82,157.391 116.82,156.261 117.023,156.058 v1(118.847,156.058) ; v1(127.907,151.075) U6.28@130.76,151.075
  BC4 w0.15: v1(118.847,156.058) 121.412,153.492 125.489,153.492 v1(126.48,152.502)
  BC1 w0.15: C28.1@126.48,153.09 v1(126.48,152.502) v1(127.907,151.075)
Net-(U6-Xout): R40.1 U6.29 | length 9.3
  FC1 w0.15: U6.29@130.76,150.575 131.949,150.575 v1(131.953,150.571)
  IC1 w0.15: v1(127.51,153.721) 130.66,150.571 v1(131.953,150.571)
  BC1 w0.15: v1(127.51,153.721) R40.1@127.51,156.09
Net-(U8-LCAS#): R58.2 U8.29 | length 15.6
  FC1 w0.15: U8.29@99.931,9.921 v1(99.931,10.871)
  BC3 w0.15: v1(99.931,10.871) 103.581,14.521 v1(103.581,22.682)
  BC1 w0.15: v1(103.581,22.682) 104.242,22.682 104.49,22.434 R58.2@104.49,22.09
Net-(U8-RAS#): R21.1 U8.14 | length 9.7
  FC1 w0.15: v1(98.331,17.424) U8.14@98.331,21.071
  BC1 w0.15: v1(98.331,17.424) 100.787,17.424 101.51,16.702 R21.1@101.51,14.09
Net-(U8-UCAS#): R51.2 U8.28 | length 21.5
  FC1 w0.15: v1(99.131,8.992) U8.28@99.131,9.921
  FC3 w0.15: v1(99.131,8.992) 99.131,19.411 98.573,19.97 98.573,23.651 v1(101.49,26.568)
  BC1 w0.15: v1(101.49,26.568) R51.2@101.49,28.09
Net-(U8-WE#): R16.1 U8.13 | length 5.9
  FC1 w0.15: v1(99.131,20.142) U8.13@99.131,21.071
  BC4 w0.15: v1(99.131,20.142) 99.365,20.142 v1(102.006,17.501)
  BC1 w0.15: v1(102.006,17.501) 102.332,17.501 102.51,17.678 R16.1@102.51,18.09
Net-(U10-AO): R77.1 U10.4 U34.11 | length 36.1
  BC4 w0.15: v1(169.12,92.496) 169.516,92.1 171.526,92.1 172.999,90.628 177.115,90.628 177.444,90.957 179.451,90.957 v1(179.908,90.5)
  BC3 w0.15: v1(169.12,92.496) 171.679,95.055 171.679,105.029 172.364,105.715 v1(172.364,110.693)
  BC1 w0.15: v1(169.12,92.496) 169.12,92.236 169.266,92.09 U34.11@170.137,92.09 ; v1(172.364,110.693) 172.591,110.693 173.15,110.134 U10.4@173.15,108.84 ; R77.1@179.51,91.09 179.908,91.09 v1(179.908,90.5)